# Altium PCB arduino_sh.PcbDoc
Units mm, origin at the board's own origin, x right, y up, seen from the top; angles counter-clockwise.
Board outline 106.93 x 68.96 mm, 2 copper layers (Top Layer, Bottom Layer); 55 components, 128 nets, 404 pads, 55 vias.
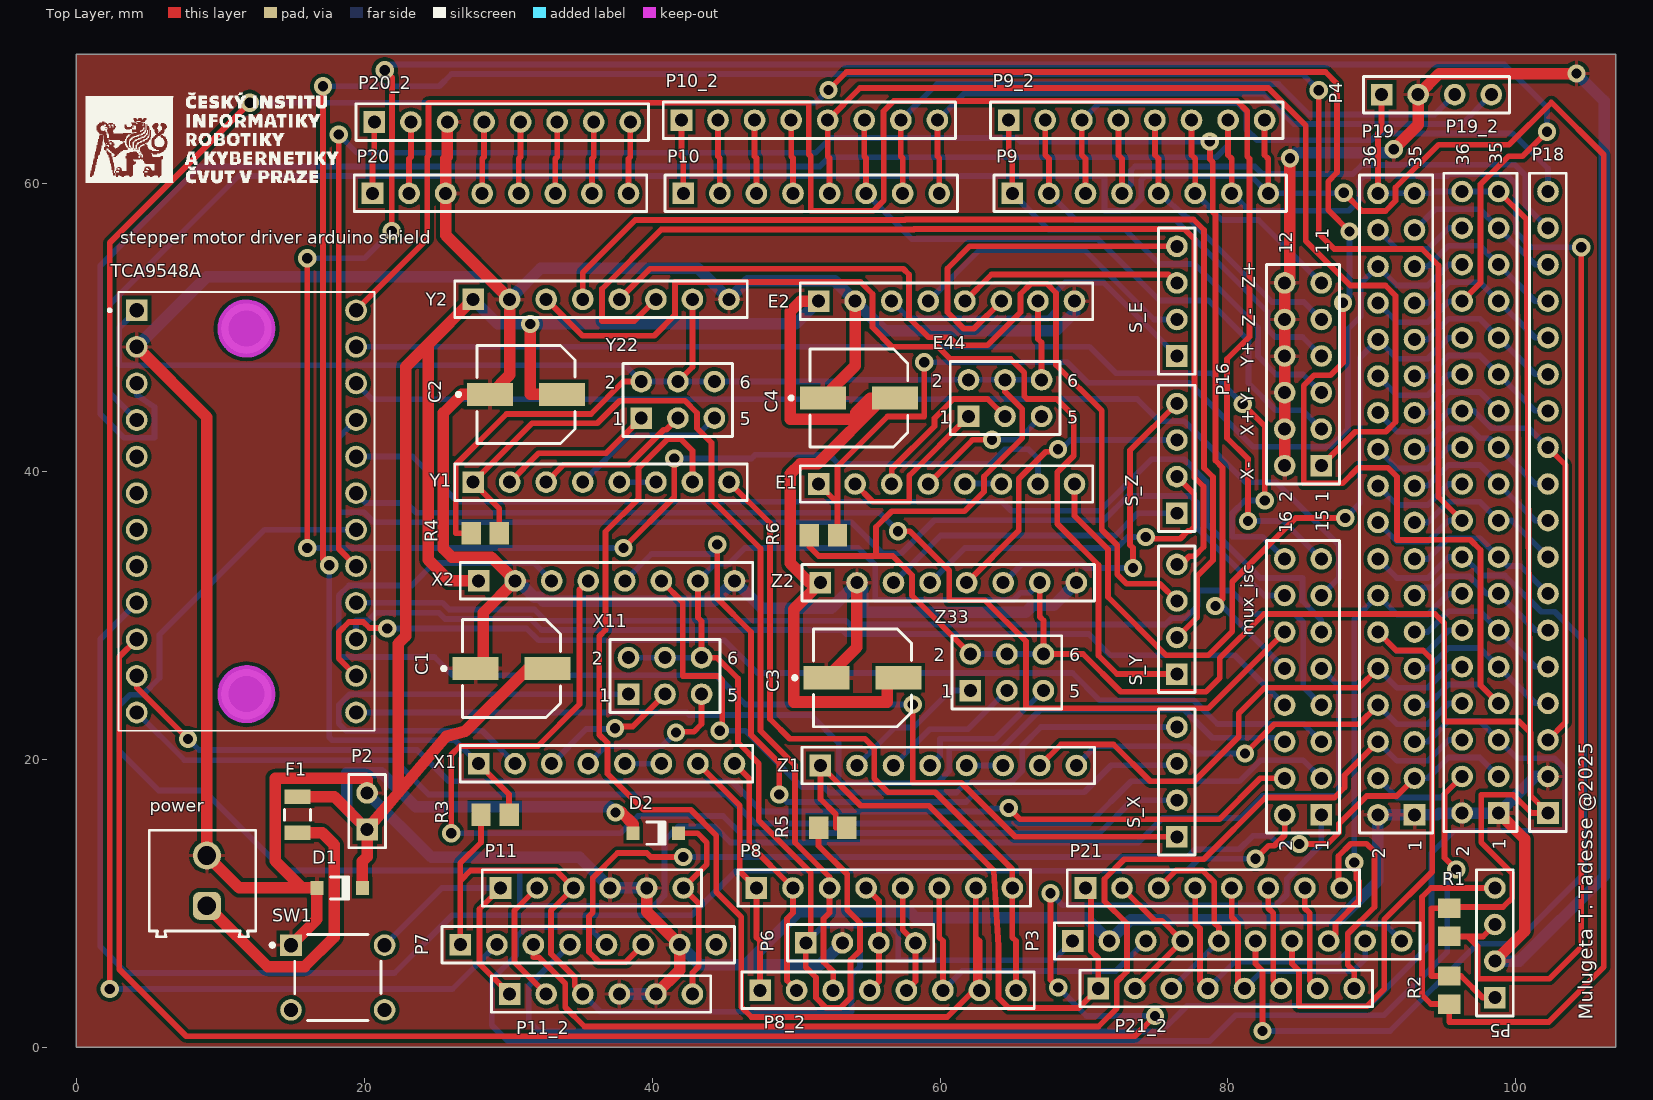
[diagram p0: Top Layer view]
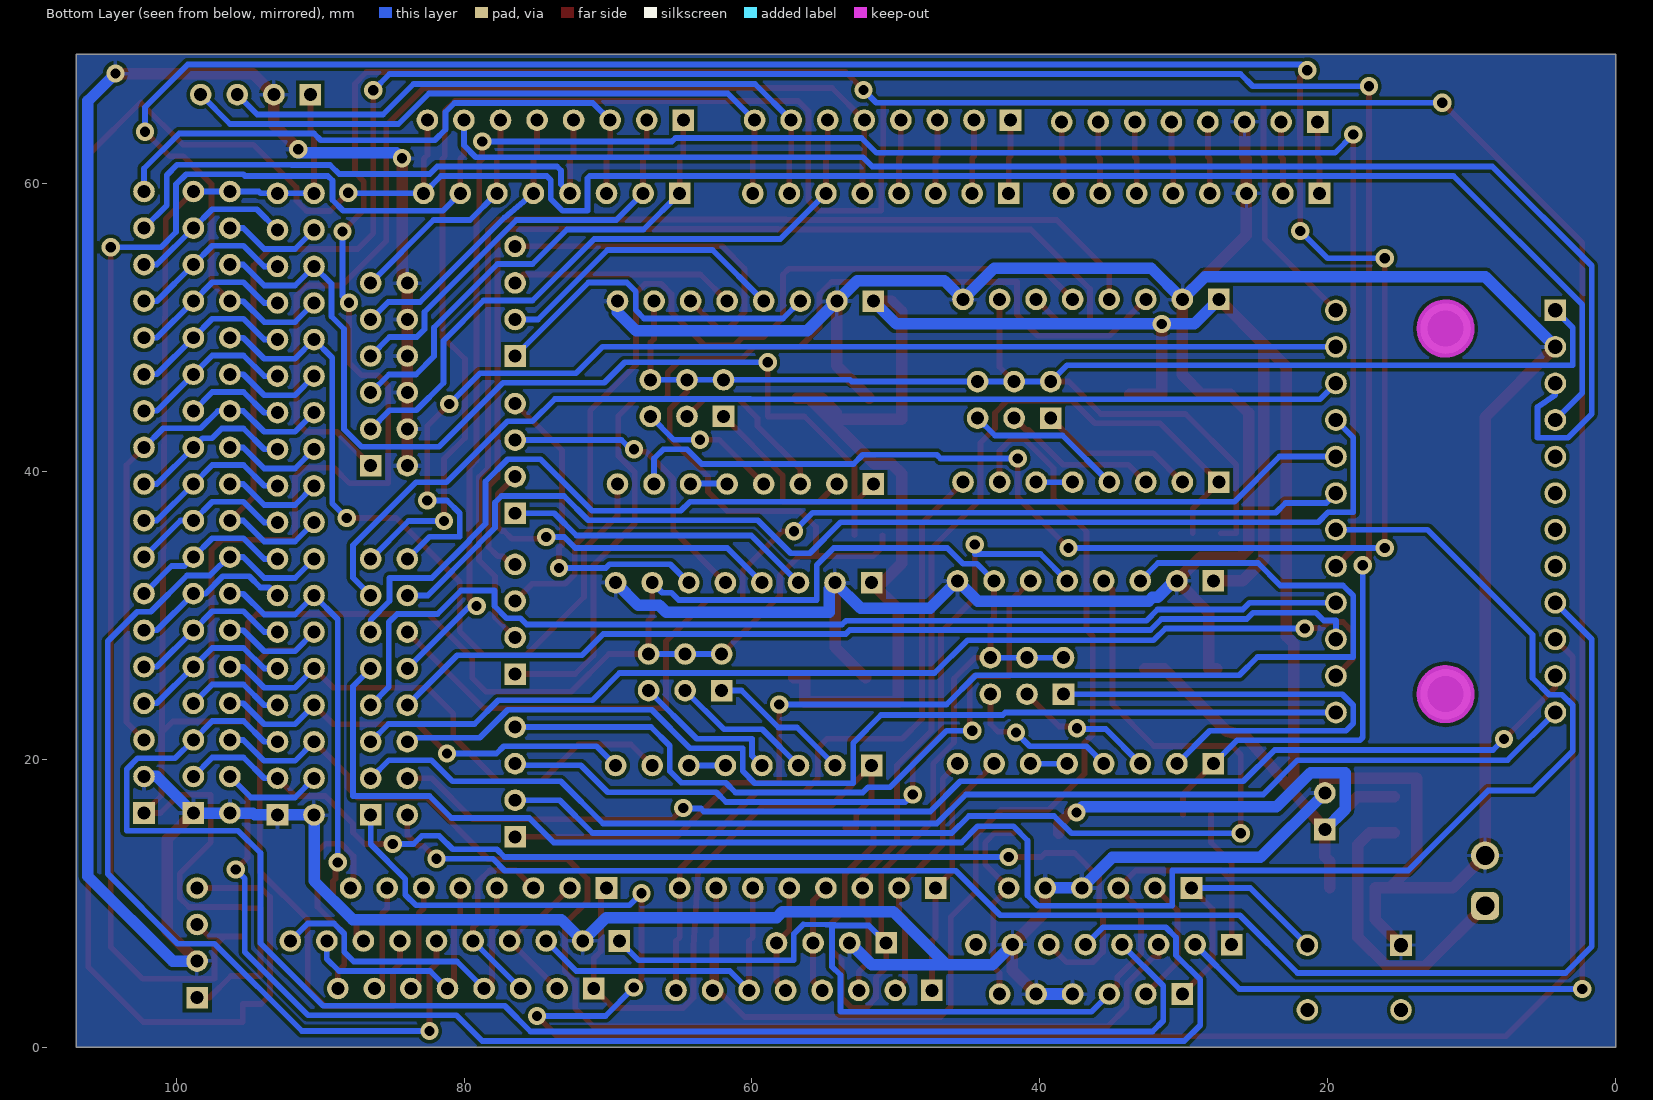
[diagram p1: Bottom Layer view, seen from below]

## Layer stack, top to bottom
Top Solder: solder mask 0.0102, Solder Resist, Dk 3.5
Top Layer: signal copper 0.0356
Dielectric 1: dielectric 0.32, FR-4, Dk 4.8
Bottom Layer: signal copper 0.0356
Bottom Solder: solder mask 0.0102, Solder Resist, Dk 3.5

## Board outline
0,0 0,68.961 106.934,68.961 106.934,0

## Design rules (kind name [scope] priority, off if disabled: settings)
Clearance [All] p1: gap=0.254 ignorepadtopadclearanceinfootprint=FALSE except(0: Arc-Hole Track-Hole SMDPad-Hole THPad-Hole Via-Hole Fill-Hole Poly-Hole Region-Hole Text-Hole)
PolygonConnect [All] p1: connectstyle=Relief reliefconductorwidth=0.254 reliefentries=4 polygonreliefangle="90 Angle" airgapwidth=0.254
RoutingVias [All] p1: holewidth=0.711 width=1.27 viastyle="Through Hole" minholewidth=0.711 minwidth=1.27 maxholewidth=0.711 maxwidth=1.27
SolderMaskExpansion [All] p1: expansion=0.102 istentingtop=FALSE
Width VCC [InNet('VCC')] p1: maxlimit=0.8 minlimit=0.8 preferedwidth=0.8
Width GND [InNet('gnd')] p2: maxlimit=0.8 minlimit=0.8 preferedwidth=0.8
Width [All] p3: maxlimit=0.8 minlimit=0.4 preferedwidth=0.4
30 further rules are at their usual default settings.

## Components (designator, comment, footprint, x,y, rotation, side; value= is the part's Value field where it differs from the comment)
C1 "EEEFT1V101AP" FP-FTD-MFG 30.226,26.289 r0 top
C2 "EEEFT1V101AP" FP-FTD-MFG 31.242,45.339 r0 top
C3 "EEEFT1V101AP" FP-FTD-MFG 54.61,25.654 r0 top
C4 "EEEFT1V101AP" FP-FTD-MFG 54.356,45.085 r0 top
D1 "1N4148W-7-F" DIOD-SOD123-2_V 18.288,11.049 r0 top
D2 "1N4148W-7-F" DIOD-SOD123-2_V 40.259,14.859 r0 top
E1 "Header 8" HDR1X8 51.562,39.116 r0 top
E2 "Header 8" HDR1X8 51.562,51.816 r0 top
E44 "Header 3X2" HDR2X3 61.976,43.815 r0 top
F1 "TR/3216FF10-R" FP-3216FF-MFG 15.367,16.129 r90 top
mux_isc "Header 8X2" HDR2X8 86.487,16.129 r90 top
P2 "Header 2" HDR1X2 20.193,15.113 r90 top
P3 "Header 10" HDR1X10 69.215,7.366 r0 top
P4 "Header 4" HDR1X4 90.678,66.167 r0 top
P5 "I2C" HDR1X4 98.552,3.429 r90 top
P6 "Header 4" HDR1X4 50.673,7.239 r0 top
P7 "Header 8" HDR1X8 26.67,7.112 r0 top
P8 "Header 8" HDR1X8 47.244,11.049 r0 top
P8_2 "Header 8" HDR1X8 47.498,3.937 r0 top
P9 "Header 8" HDR1X8 65.024,59.309 r0 top
P9_2 "Header 8" HDR1X8 64.77,64.389 r0 top
P10 "Header 8" HDR1X8 42.164,59.309 r0 top
P10_2 "Header 8" HDR1X8 42.037,64.389 r0 top
P11 "Header 6" HDR1X6 29.464,11.049 r0 top
P11_2 "Header 6" HDR1X6 30.099,3.683 r0 top
P16 "LIMIT_SWITCH" HDR2X6 86.487,40.386 r90 top
P18 "Header 18" HDR1X18 102.235,16.256 r90 top
P19 "Header 18X2" HDR2X18 92.964,16.129 r90 top
P19_2 "Header 18X2" HDR2X18 98.806,16.256 r90 top
P20 "Header 8" HDR1X8 20.574,59.309 r0 top
P20_2 "Header 8" HDR1X8 20.701,64.262 r0 top
P21 "Header 8" HDR1X8 70.104,11.049 r0 top
P21_2 "Header 8" HDR1X8 70.993,4.064 r0 top
power "691214110002" 691214110002 8.763,11.557 r90 top
R1 "4.7K" RESC2013X70X40ML20T20 95.377,8.659 r270 top
R2 "4.7K" RESC2013X70X40ML20T20 95.377,3.96 r270 top
R3 "ERJ-6ENF1002V" RESC2013X70X40ML20T20 29.083,16.129 r0 top
R4 "ERJ-6ENF1002V" RESC2013X70X40ML20T20 28.407,35.687 r0 top
R5 "ERJ-6ENF1002V" RESC2013X70X40ML20T20 52.537,15.24 r0 top
R6 "ERJ-6ENF1002V" RESC2013X70X40ML20T20 51.902,35.56 r0 top
S_E "Header 4" HDR1X4 76.454,48.006 r90 top
S_X "Header 4" HDR1X4 76.454,14.605 r90 top
S_Y "Header 4" HDR1X4 76.454,25.908 r90 top
S_Z "Header 4" HDR1X4 76.454,37.084 r90 top
SW1 "1825910-6" TECO-1825910-6_V 18.161,4.826 r0 top
TCA9548A "2717" MODULE_2717 11.811,37.211 r0 top
X1 "Header 8" HDR1X8 27.94,19.685 r0 top
X2 "Header 8" HDR1X8 27.94,32.385 r0 top
X11 "Header 3X2" HDR2X3 38.354,24.511 r0 top
Y1 "Header 8" HDR1X8 27.559,39.243 r0 top
Y2 "Header 8" HDR1X8 27.559,51.943 r0 top
Y22 "Header 3X2" HDR2X3 39.243,43.688 r0 top
Z1 "Header 8" HDR1X8 51.689,19.558 r0 top
Z2 "Header 8" HDR1X8 51.689,32.258 r0 top
Z33 "Header 3X2" HDR2X3 62.103,24.765 r0 top

## Footprints (in the part's own frame and the unit in brackets; to place one, negate y for a bottom-side part, rotate by r counter-clockwise, add the part's x,y. Pads: shape width x height; smd on the part's side, far side on the other; paste and mask are expansions set on the pad)
691214110002 [mm] "3.50 mm Horizontal Entry Modular, 2p"
  rrect50% 1.95x1.95 hole 1.3: 1(-1.75,-0.3)
  round 1.95 hole 1.3: 2(1.75,-0.3)
  silkscreen extent -3.9,-3.7 3.5,3.7, body extent -3.95,-3.7 3.5,3.7, height 8.55
DIOD-SOD123-2_V [mm] "SOD123, 2-Leads, Body 2.7x1.55mm, Height 1.45mm"
  rect 0.9x0.95 smd: 1(-1.575,0) 2(1.575,0)
  silkscreen extent -0.63,-0.83 0.64,0.77, body extent -1.35,-0.77 1.35,0.77, height 1.45
FP-3216FF-MFG [mm]
  rect 1x1.8 smd paste+0 mask+0: 1(-1.25,0) 2(1.25,0)
  silkscreen extent -0.37,-0.9 0.37,0.9, body extent -1.85,-1 1.85,1, height 0.25
FP-FTD-MFG [mm]
  rect 3.2x1.6 smd paste+0 mask+0: 1(-2.5,0) 2(2.5,0)
  silkscreen extent -4.82,-3.4 3.4,3.4, body extent -4.35,-3.65 4.35,3.65, height 0.25
HDR1X2 [mm] "Connector; Header; 2 Position"
  rect 1.5x1.5 hole 0.9: 1(0,0)
  round 1.5 hole 0.9: 2(2.54,0)
  silkscreen extent -1.27,-1.27 3.81,1.27
HDR1X4 [mm] "Connector; Header; 4 Position"
  rect 1.5x1.5 hole 0.9: 1(0,0)
  round 1.5 hole 0.9: 2(2.54,0) 3(5.08,0) 4(7.62,0)
  silkscreen extent -1.27,-1.27 8.89,1.27
HDR1X6 [mm] "Connector; Header; 6 Position"
  rect 1.5x1.5 hole 0.9: 1(0,0)
  round 1.5 hole 0.9: 2(2.54,0) 3(5.08,0) 4(7.62,0) 5(10.16,0) 6(12.7,0)
  silkscreen extent -1.27,-1.27 13.97,1.27
HDR1X8 [mm] "Connector; Header; 8 Position"
  rect 1.5x1.5 hole 0.9: 1(0,0)
  round 1.5 hole 0.9: 2(2.54,0) 3(5.08,0) 4(7.62,0) 5(10.16,0) 6(12.7,0) 7(15.24,0) 8(17.78,0)
  silkscreen extent -1.27,-1.27 19.05,1.27
HDR1X10 [mm] "Connector; Header; 10 Position"
  rect 1.5x1.5 hole 0.9: 1(0,0)
  round 1.5 hole 0.9: 2(2.54,0) 3(5.08,0) 4(7.62,0) 5(10.16,0) 6(12.7,0) 7(15.24,0) 8(17.78,0) 9(20.32,0) 10(22.86,0)
  silkscreen extent -1.27,-1.27 24.13,1.27
HDR1X18 [mm] "Connector; Header; 18 Position"
  rect 1.5x1.5 hole 0.9: 1(0,0)
  round 1.5 hole 0.9: 2(2.54,0) 3(5.08,0) 4(7.62,0) 5(10.16,0) 6(12.7,0) 7(15.24,0) 8(17.78,0) 9(20.32,0) 10(22.86,0) 11(25.4,0) 12(27.94,0) 13(30.48,0) 14(33.02,0) 15(35.56,0) 16(38.1,0) 17(40.64,0) 18(43.18,0)
  silkscreen extent -1.27,-1.27 44.45,1.27
HDR2X3 [mm] "Connector; Header; 3x2 Position"
  rect 1.5x1.5 hole 0.9: 1(0,0)
  round 1.5 hole 0.9: 2(0,2.54) 3(2.54,0) 4(2.54,2.54) 5(5.08,0) 6(5.08,2.54)
  silkscreen extent -1.27,-1.27 6.35,3.81
HDR2X6 [mm] "Connector; Header; 6x2 Position"
  rect 1.5x1.5 hole 0.9: 1(0,0)
  round 1.5 hole 0.9: 2(0,2.54) 3(2.54,0) 4(2.54,2.54) 5(5.08,0) 6(5.08,2.54) 7(7.62,0) 8(7.62,2.54) 9(10.16,0) 10(10.16,2.54) 11(12.7,0) 12(12.7,2.54)
  silkscreen extent -1.27,-1.27 13.97,3.81
HDR2X8 [mm] "Connector; Header; 8x2 Position"
  rect 1.5x1.5 hole 0.9: 1(0,0)
  round 1.5 hole 0.9: 2(0,2.54) 3(2.54,0) 4(2.54,2.54) 5(5.08,0) 6(5.08,2.54) 7(7.62,0) 8(7.62,2.54) 9(10.16,0) 10(10.16,2.54) 11(12.7,0) 12(12.7,2.54) 13(15.24,0) 14(15.24,2.54) 15(17.78,0) 16(17.78,2.54)
  silkscreen extent -1.27,-1.27 19.05,3.81
HDR2X18 [mm] "Connector; Header; 18x2 Position"
  rect 1.5x1.5 hole 0.9: 1(0,0)
  round 1.5 hole 0.9: 2(0,2.54) 3(2.54,0) 4(2.54,2.54) 5(5.08,0) 6(5.08,2.54) 7(7.62,0) 8(7.62,2.54) 9(10.16,0) 10(10.16,2.54) 11(12.7,0) 12(12.7,2.54) 13(15.24,0) 14(15.24,2.54) 15(17.78,0) 16(17.78,2.54) 17(20.32,0) 18(20.32,2.54) 19(22.86,0) 20(22.86,2.54) 21(25.4,0) 22(25.4,2.54) 23(27.94,0) 24(27.94,2.54) 25(30.48,0) 26(30.48,2.54) 27(33.02,0) 28(33.02,2.54) 29(35.56,0) 30(35.56,2.54) 31(38.1,0) 32(38.1,2.54) 33(40.64,0) 34(40.64,2.54) 35(43.18,0) 36(43.18,2.54)
  silkscreen extent -1.27,-1.27 44.45,3.81
MODULE_2717 [mil]
  rect 59.37x59.37 / inner round 59.37 / far side rect 59.37x59.37 hole 39.37 mask+1.97: 1(-300,550)
  round 59.37 hole 39.37 mask+1.97: 2(-300,450) 3(-300,350) 4(-300,250) 5(-300,150) 6(-300,50) 7(-300,-50) 8(-300,-150) 9(-300,-250) 10(-300,-350) 11(-300,-450) 12(-300,-550) 13(300,-550) 14(300,-450) 15(300,-350) 16(300,-250) 17(300,-150) 18(300,-50) 19(300,50) 20(300,150) 21(300,250) 22(300,350) 23(300,450) 24(300,550)
  round 138.43 hole 98.43 mask+1.97: P1(0,500) P2(0,-500)
  Keep-Out Layer circle w80: c0,-500 r39.37
  Keep-Out Layer circle w80: c0,-500 r39.37
  Keep-Out Layer circle w80: c0,500 r39.37
  Keep-Out Layer circle w80: c0,500 r39.37
  silkscreen extent -378,-600 350,600
RESC2013X70X40ML20T20 [mm] "Chip Resistor, 2-Leads, Body 2.00x1.25mm, IPC Low Density"
  rect 1.35x1.55 smd: 1(-0.975,0) 2(0.975,0)
  body extent -1.1,-0.72 1.1,0.72, height 0.7
TECO-1825910-6_V [mm] "Switch, 4-Leads, Body 5.99x5.99mm"
  rect 1.5x1.5 hole 0.99: 1(-3.25,2.25)
  round 1.5 hole 0.99: 2(3.25,2.25) 3(-3.25,-2.25) 4(3.25,-2.25)
  silkscreen extent -4.67,-2.99 2.99,2.99, body extent -3,-2.99 2.99,3, height 5

## Part data
C1 C2 C3 C4: library part CMP-05427-000027-1, "CAP ALUM 100UF 20% 35V SMD", Capacitance=100uF, Case/Package=Radial, ESR (Equivalent Series Resistance)=260mR, Leakage Current=35uA, Max Operating Temperature=105°C, Min Operating Temperature=-55°C, Package Quantity=1000, Ripple Current=300mA, Tolerance=20%, Voltage=35V, Construction=Cylindrical, Contact Plating=Tin, Diameter=6.3mm, Height=5.8mm, Height - Seated (Max)=0.24inch, Lead Diameter=0.65mm, Lead Pitch=1.8mm, Length=5.8mm, Life (Hours)=2000Hour, Mount="Surface Mount", Number of Pins=2, Packaging="Tape and Reel", Polarity=Polar, Radiation Hardening=No, REACH SVHC="No SVHC", Ripple Current (AC)=300mA, RoHS Compliant=Yes, Series=FT, Termination=SMD/SMT, Voltage Rating=35V, Voltage Rating (DC)=35V
D1 D2: library part CMP-2000-04932-2, "Fast Switching Diode, 100 V, 0.15 A, -65 to 150 degC, 2-Pin?SOD123, RoHS, Tape and Reel", If - Forward Current=0.15A, Ir - Reverse Current=1uA, Manufacturer=DiodesIncorporated, Max Surge Current=2A, Maximum Operating Temperature=+150C, Minimum Operating Temperature=-65C, Operating Temperature Range=-65Cto+150C, Package / Case=SOD-123, Package Reference=SOD123-2, Peak Reverse Voltage=100V, Vf - Forward Voltage=1.25V, Brand=DiodesIncorporated, Configuration=Single, Datasheet URL=http://www.farnell.com/datasheets/1915529.pdf, Datasheet Version="Rev. 24-2, 10/2013", Factory Pack Quantity=3000, Height=1.25mm, Length=2.85mm, Manufacturer URL=http://www.diodes.com/, Mounting Style=SMD/SMT, Package URL=http://www.diodes.com/datasheets/ds18004.pdf, Packaging=Reel, Product=SwitchingDiodes, Product Category=Diodes-GeneralPurpose,Power,Switching, Recovery Time=4ns, RoHS=True, Series=1N4148, Type=SwitchingDiode, Unit Weight=0.000353oz, Width=1.7mm
E1 E2 P7 P8 P8_2 P9 P9_2 P10 P10_2 P20 P20_2 P21 P21_2 X1 X2 Y1 Y2 Z1 Z2: "Header, 8-Pin", LatestRevisionDate=17-Jul-2002, LatestRevisionNote="Re-released for DXP Platform.", Publisher="Altium Limited"
E44 X11 Y22 Z33: "Header, 3-Pin, Dual row", LatestRevisionDate=17-Jul-2002, LatestRevisionNote="Re-released for DXP Platform.", Publisher="Altium Limited"
F1: library part CMP-03047-09453137-1, "TR/3216FF10-R 10 A AC 24 V DC Fuse Board Mount (Cartridge Style Excluded) Surface Mount 1206 (3216 Metric)", Case/Package=1206, Current Rating=10A, Max Operating Temperature=125°C, Max Voltage Rating (DC)=24V, Min Operating Temperature=-55°C, Resistance=4.5mΩ, Voltage Rating (AC)=32V, Approvals="CSA, UR", Depth=1.6mm, Fuse Current=10A, Height=889µm, Length=3.2mm, Mount="Surface Mount", NexarPartId=9453137, Number of Pins=2, Packaging="Cut Tape", Radiation Hardening=No, REACH SVHC="No SVHC", RoHS=Compliant, Schedule B="8536100040, 8536100040", Termination=SMD/SMT, Voltage Rating=24V, Voltage Rating (DC)=24V, Weight=453.59237mg, Width=1.6mm
mux_isc: "Header, 8-Pin, Dual row", LatestRevisionDate=17-Jul-2002, LatestRevisionNote="Re-released for DXP Platform.", Publisher="Altium Limited"
P2: "Header, 2-Pin", LatestRevisionDate=17-Jul-2002, LatestRevisionNote="Re-released for DXP Platform.", Publisher="Altium Limited"
P3: "Header, 10-Pin", LatestRevisionDate=17-Jul-2002, LatestRevisionNote="Re-released for DXP Platform.", Publisher="Altium Limited"
P4 P6 S_E S_X S_Y S_Z: "Header, 4-Pin", LatestRevisionDate=17-Jul-2002, LatestRevisionNote="Re-released for DXP Platform.", Publisher="Altium Limited"
P5: library part "Header 4", "Header, 4-Pin", LatestRevisionDate=17-Jul-2002, LatestRevisionNote="Re-released for DXP Platform.", Publisher="Altium Limited"
P11 P11_2: "Header, 6-Pin", LatestRevisionDate=17-Jul-2002, LatestRevisionNote="Re-released for DXP Platform.", Publisher="Altium Limited"
P16: library part "Header 6X2", "Header, 6-Pin, Dual row", LatestRevisionDate=17-Jul-2002, LatestRevisionNote="Re-released for DXP Platform.", Publisher="Altium Limited"
P18: "Header, 18-Pin", LatestRevisionDate=17-Jul-2002, LatestRevisionNote="Re-released for DXP Platform.", Publisher="Altium Limited"
P19 P19_2: "Header, 18-Pin, Dual row", LatestRevisionDate=17-Jul-2002, LatestRevisionNote="Re-released for DXP Platform.", Publisher="Altium Limited"
power: library part CMP-1502-02464-2, Color="Blue, Green", Current=10A, Max Operating Temperature=105°C, Min Operating Temperature=-40°C, Voltage=300V, Contact Material=Brass, Contact Plating="Brass, Tin", Current Rating=10A, Height=8.7mm, Housing Material=Nylon, Lead Pitch=3.5mm, Length=7.4mm, Mount="Through Hole", NexarPartId=18818288, Number of Contacts=2, Number of Levels=1, Number of Pins=2, Number of Positions Per Level=2, Number of Rows=1, Packaging=Box, Pitch=3.5052mm, Plating="Brass, Steel", REACH SVHC=Unknown, RoHS=Compliant, Stripping Length=-6mm, Termination=Screw, Voltage Rating=300V, Width=7.9mm, Wire Gauge (Max)=24AWG, Wire Gauge (Min)=16AWG, Wire/Cable Gauge=24AWG
R1 R2: library part CMP-2001-04376-1, Manufacturer=Panasonic, Part Number=ERJ-6ENF1002V
R3 R4 R5 R6: library part CMP-2001-04376-1, Manufacturer=Panasonic, Part Number=ERJ-6ENF1002V
SW1: library part CMP-1684-00021-1, "Tact Switch, SPST-NO, 0.05 A, -35 to 85 degC, 4-Pin THD, RoHS, Bulk", Actuator Color=Black, Contact Rating @ Voltage=0.05A@24VDC, Dielectric Strength=500VAC, Manufacturer="TE Connectivity", Maximum AC Voltage Rating=N/A, Maximum Contact Resistance=100mOhm, Maximum DC Voltage Rating=24V, Minimum Insulation Resistance=100MOhm, Operating Temperature=-35to85C, Package Description="4-Pin Through Hole Device, Body 5.99 x 5.99 mm, Pitch 6.5 mm", Package Reference=THD, Actuator Length=1.4mm, Actuator Material=PolybutyleneTerephthalate, Actuator Style=RoundButton, Base Material=N/A, Body Orientation=Straight, Bushing Type=Unthreaded, Contact Material=CopperAlloy, Contact Plating=Silver, Datasheet URL=http://www.te.com/commerce/DocumentDelivery/DDEController?Action=showdoc&DocId=Customer+Drawing%7F1825910%7FC9%7Fpdf%7FEnglish%7FENG_CD_1825910_C9.pdf%7F1825910-6, Datasheet Version="Rev. C9", Dimension=5.99x5mm, Electrical Life=100000Cycles, Family=1825910, Function=MomentaryContact, Housing Material=N/A, Illumination=N/R, Manufacturer URL=http://www.te.com, Mechanical Life=100000Cycles, Mounting=ThroughHole, Packaging=N/A, Part No=1825910-6, Pole Throw Configuration=SPST, Product Weight=N/A, RoHS=Yes, Seal Description=N/A, Seal Location=N/A, Switch Configuration=OFF(ON), Terminal Type=PCPins, Thread Size=N/R
TCA9548A: "Module: multiplexer; I2C interface multiplexer; TCA9548A; 3Ã·5VDC", Package=None, Availability="In Stock", Check_prices=https://www.snapeda.com/parts/2717/Adafruit+Industries+LLC/view-part/?ref=eda, MF=Adafruit, MP=2717, Price=None, Purchase-URL=https://pricing.snapeda.com/search/part/2717/?ref=eda, SnapEDA_Link=https://www.snapeda.com/parts/2717/Adafruit+Industries+LLC/view-part/?ref=snap

## Via types
v1: diameter 1.27, hole 0.711, Top Layer to Bottom Layer, 55 vias

## Nets (pads, with @x,y where several pads share a name; then routed paths per layer and width w, separated by ;. In a path a pad name is that pad's centre, name@x,y a point inside that pad or via, vN(x,y) a via of type N, cw(c..) or ccw(c..) an arc to the next point about the centre after c; other vN are vias at no path point)
A1_e: E2.5 S_E.3 | length 15.7
  Top Layer w0.4: E2.5 63.58,53.674 75.866,53.674 S_E.3
A1_x: S_X.3 X2.5 | length 56
  Top Layer w0.4: v1(44.516,34.917) 44.516,31.181 46.872,28.825 46.872,21.694 48.829,19.738 v1(48.829,17.54)
  Bottom Layer w0.4: X2.5 39.958,34.243 44.516,34.243 v1(44.516,34.917) ; v1(48.829,17.54) 49.346,17.023 61.798,17.023 62.475,17.7 70.017,17.7 71.89,19.573 76.161,19.573 76.161,19.685 S_X.3
A1_y: S_Y.3 Y2.5 | length 64.2
  Top Layer w0.4: Y2.5 39.845,54.069 57.451,54.069 57.846,53.674 57.846,50.653 59.19,49.309 60.654,49.309 61.203,48.76 63.305,48.76 65.591,51.046 65.591,52.316 66.295,53.02 67.427,53.02 68.055,52.392 68.055,47.388 71.23,44.213 71.23,35.942 72.317,34.855 72.317,32.823 72.955,32.185 75.257,32.185 S_Y.3
A1_z: S_Z.3 Z2.5 | length 20.8
  Top Layer w0.4: Z2.5 65.466,35.875 65.466,39.483 67.346,41.363 68.033,41.363 v1(68.199,41.529)
  Bottom Layer w0.4: v1(68.199,41.529) 68.434,41.529 69.069,42.164 S_Z.3
A2_e: E2.6 S_E.4 | length 24.6
  Top Layer w0.4: E2.6 62.349,49.903 61.654,49.903 60.511,51.046 60.511,54.094 62.043,55.626 S_E.4
A2_x: S_X.4 X2.6 | length 50.1
  Top Layer w0.4: X2.6 42.121,30.904 42.121,25.773 44.587,25.773 44.864,25.496 44.864,22.131 v1(44.704,21.971)
  Bottom Layer w0.4: v1(44.704,21.971) 46.482,21.971 50.402,18.051 51.932,18.051 52.307,17.677 61.144,17.677 61.821,18.354 64.905,18.354 65.718,19.167 65.718,20.933 67.01,22.225 S_X.4
A2_y: S_Y.4 Y2.6 | length 73.8
  Top Layer w0.4: Y2.6 38.752,50.436 36.508,50.436 36.508,52.672 40.633,56.797 58.173,56.797 58.213,56.837 76.97,56.837 77.681,56.126 77.681,39.573 78.312,38.942 78.312,34.735 77.667,34.09 77.314,34.09 76.752,33.528 S_Y.4
A2_z: S_Z.4 Z2.6 | length 22.5
  Top Layer w0.4: v1(73.406,33.274) 73.406,34.68 73.206,34.88 73.206,41.456 S_Z.4
  Bottom Layer w0.4: Z2.6 65.672,33.541 69.889,33.541 70.156,33.274 v1(73.406,33.274)
A3: P4.3 P10.7 P10_2.7 | length 46.1
  Top Layer w0.4: P10_2.7 57.277,61.892 57.404,61.765 P10.7
  Bottom Layer w0.4: P10_2.7 59.789,66.901 83.521,66.901 85.642,64.78 94.371,64.78 P4.3
A4: P4.4 P10.8 P10_2.8 | length 46.1
  Top Layer w0.4: P10_2.8 59.817,61.892 59.944,61.765 P10.8
  Bottom Layer w0.4: P10_2.8 61.675,66.247 82.445,66.247 84.566,64.126 96.257,64.126 P4.4
A5: P3.3 P8.6 P8_2.6 | length 22.7
  Top Layer w0.4: P8.6 59.944,7.612 60.198,7.358 P8_2.6
  Bottom Layer w0.4: P8_2.6 61.536,5.275 72.204,5.275 P3.3
A9: P3.4 P21.2 P21_2.2 | length 10.4
  Top Layer w0.4: P21.2 74.913,8.78 75.421,8.78 P3.4 P21_2.2
A10: P3.5 P21.3 P21_2.3 | length 13.6
  Top Layer w0.4: P21.3 76.395,12.26 78.24,12.26 79.053,11.447 79.053,8.62 79.375,8.298 P3.5
  Bottom Layer w0.4: P21_2.3 P3.5
A11: P3.10 P21.4 P21_2.4 | length 23.9
  Top Layer w0.4: P21.4 77.724,8.577 78.062,8.239 78.062,4.615 P21_2.4
  Bottom Layer w0.4: P21_2.4 80.485,5.936 87.663,5.936 88.324,6.596 88.324,7.866 89.035,8.577 90.864,8.577 P3.10
A12: P3.9 P21.5 P21_2.5 | length 17.8
  Top Layer w0.4: P21.5 80.264,9.017 80.704,8.577 80.704,4.513 P21_2.5
  Bottom Layer w0.4: P21_2.5 82.364,5.275 88.689,5.275 89.535,6.122 P3.9
B1_e: E2.4 S_E.2 | length 20.7
  Bottom Layer w0.4: E2.4 62.743,55.377 70.04,55.377 74.871,50.546 S_E.2
B1_x: S_X.2 X2.4 | length 77
  Top Layer w0.4: v1(26.035,14.859) 26.035,20.304 26.653,20.922 32.063,20.922 34.958,23.817 34.958,31.783 X2.4
  Bottom Layer w0.4: v1(26.035,14.859) 26.043,14.851 37.803,14.851 39.009,16.057 44.931,16.057 46.12,14.868 71.081,14.868 73.358,17.145 S_X.2
B1_y: S_Y.2 Y2.4 | length 76.5
  Top Layer w0.4: Y2.4 35.179,53.807 38.823,57.451 57.559,57.451 57.606,57.498 77.605,57.498 78.342,56.761 78.342,40.22 78.966,39.596 78.966,33.816 77.85,32.7 77.85,29.844 S_Y.2
B1_z: S_Z.2 Z2.4 | length 24
  Top Layer w0.4: v1(74.295,35.433) 74.422,35.306 76.689,35.306 77.232,35.849 77.375,35.849 77.658,36.131 77.658,38.42 S_Z.2
  Bottom Layer w0.4: Z2.4 61.714,34.663 72.274,34.663 73.044,35.433 v1(74.295,35.433)
B2_e: E2.3 S_E.1 | length 24.2
  Bottom Layer w0.4: E2.3 57.846,50.612 67.494,50.612 68.08,51.198 68.08,52.494 68.696,53.11 71.35,53.11 S_E.1
B2_x: S_X.1 X2.3 | length 87.1
  Top Layer w0.4: v1(58.098,23.792) 58.098,18.354 61.478,18.354 65.227,14.605 S_X.1
  Bottom Layer w0.4: X2.3 31.783,33.622 24.849,33.622 23.3,32.072 18.931,32.072 18.22,31.361 18.22,27.094 24.875,27.094 26.145,25.824 44.458,25.824 46.49,23.792 v1(58.098,23.792)
B2_y: S_Y.1 Y2.3 | length 71
  Top Layer w0.4: Y2.3 35.162,49.42 40.14,49.42 41.588,50.868 41.588,53.154 54.467,53.154 55.306,52.315 55.306,49.999 56.65,48.655 59.854,48.655 60.714,47.795 64.905,47.795 65.845,46.855 65.845,45.219 66.038,45.026 68.105,45.026 69.288,43.844 69.288,41.078 68.138,39.928 68.138,36.358 71.009,33.487 71.009,27.196 72.297,25.908 S_Y.1
B2_z: S_Z.1 Z2.3 | length 21.7
  Bottom Layer w0.4: Z2.3 60.047,35.536 72.195,35.536 73.743,37.084 S_Z.1
D1: P6.4 P8.5 P8_2.5 | length 7.7
  Top Layer w0.4: P8.5 57.404,8.128 P6.4 58.293,4.572 P8_2.5
D2: P6.3 P8.4 P8_2.4 | length 7.7
  Top Layer w0.4: P8.4 55.753,10.16 P6.3 55.753,4.572 P8_2.4
D4: P10.4 P10_2.4 | length 5.1
  Top Layer w0.4: P10_2.4 49.657,61.892 49.784,61.765 P10.4
D5: P10.3 P10_2.3 | length 5.1
  Top Layer w0.4: P10_2.3 47.117,61.892 47.244,61.765 P10.3
D6: P10.2 P10_2.2 | length 5.1
  Top Layer w0.4: P10_2.2 44.577,61.892 44.704,61.765 P10.2
D8: P20.8 P20_2.8 | length 5
  Top Layer w0.4: P20.8 38.354,61.714 38.481,61.841 P20_2.8
D9: P20.7 P20_2.7 | length 5
  Top Layer w0.4: P20.7 35.814,61.714 35.941,61.841 P20_2.7
D10: P20.6 P20_2.6 | length 5
  Top Layer w0.4: P20.6 33.274,61.714 33.401,61.841 P20_2.6
D11: P20.5 P20_2.5 | length 5
  Top Layer w0.4: P20.5 30.734,61.714 30.861,61.841 P20_2.5
D16: P9.3 P9_2.3 P18.18 | length 42.7
  Top Layer w0.4: P9_2.3 69.85,61.968 70.104,61.714 P9.3
  Bottom Layer w0.4: P9_2.3 71.054,65.593 80.66,65.593 81.288,64.965 81.288,63.746 82.032,63.002 89.954,63.002 90.424,63.472 99.794,63.472 102.235,61.031 P18.18
D17: P9.4 P9_2.4 P18.17 | length 39.6
  Top Layer w0.4: P9_2.4 72.39,61.968 72.644,61.714 P9.4
  Bottom Layer w0.4: P9.4 73.267,59.932 73.267,60.888 73.546,61.167 81.871,61.167 82.388,60.65 88.672,60.65 89.307,61.285 91.975,61.285 91.984,61.294 99.941,61.294 100.664,60.571 100.664,58.467 P18.17
D23: P18.16 P19.33 P19_2.33 | length 11.5
  Bottom Layer w0.4: P19.33 94.404,58.209 97.493,58.209 P19_2.33 101.346,54.356 P18.16
D25: P18.15 P19.31 P19_2.31 | length 11.5
  Bottom Layer w0.4: P19.31 93.886,54.229 95.326,55.669 97.493,55.669 P19_2.31 101.346,51.816 P18.15
D27: P18.14 P19.29 P19_2.29 | length 11.5
  Bottom Layer w0.4: P19.29 93.886,51.689 95.326,53.129 97.493,53.129 P19_2.29 101.346,49.276 P18.14
D29: P18.13 P19.27 P19_2.27 | length 11.5
  Bottom Layer w0.4: P19.27 93.886,49.149 95.326,50.589 97.493,50.589 P19_2.27 101.346,46.736 P18.13
D31: P18.12 P19.25 P19_2.25 | length 11.5
  Bottom Layer w0.4: P19.25 93.886,46.609 95.326,48.049 97.493,48.049 P19_2.25 101.346,44.196 P18.12
D32: P18.3 P18.11 P19.24 P19_2.24 | length 35.4
  Top Layer w0.4: P18.3 103.462,22.563 103.462,40.429 P18.11
  Bottom Layer w0.4: P19.24 91.753,42.74 93.886,42.74 95.342,44.196 P19_2.24 97.103,44.196 98.307,42.992 100.899,42.992 P18.11
D33: P19.23 P19_2.23 | length 7
  Bottom Layer w0.4: P19.23 93.886,44.069 95.326,45.509 97.493,45.509 P19_2.23
D35: P18.10 P19.21 P19_2.21 | length 11.5
  Bottom Layer w0.4: P19.21 93.886,41.529 95.326,42.969 96.833,42.969 97.509,42.293 98.169,42.293 P19_2.21 101.346,39.116 P18.10
D37: P18.9 P19.19 P19_2.19 | length 11.5
  Bottom Layer w0.4: P19.19 93.886,38.989 95.326,40.429 97.493,40.429 P19_2.19 101.346,36.576 P18.9
D39: P18.8 P19.17 P19_2.17 | length 11.5
  Bottom Layer w0.4: P19.17 93.886,36.449 95.326,37.889 97.493,37.889 P19_2.17 99.695,36.576 P18.8
D40: P3.6 P19.16 P19_2.16 | length 67.4
  Top Layer w0.4: P3.6 81.915,5.791 82.406,5.301 v1(82.406,1.11)
  Bottom Layer w0.4: v1(82.406,1.11) 91.27,1.11 97.341,7.18 99.906,7.18 104.758,12.032 104.758,28.186 102.7,30.243 101.763,30.243 99.248,32.758 97.67,32.758 97.029,33.399 P19_2.16 95.342,34.036 93.886,32.58 91.753,32.58 P19.16
D41: P18.7 P19.15 P19_2.15 | length 11.5
  Bottom Layer w0.4: P19.15 93.886,33.909 95.326,35.349 97.493,35.349 P19_2.15 99.429,33.413 100.318,33.413 P18.7
D42: P3.8 P19.14 P19_2.14 | length 32.7
  Top Layer w0.4: P3.8 87.47,7.841 87.47,8.553 89.111,10.193 89.111,11.525 88.939,11.696 88.939,12.661 v1(88.773,12.827)
  Bottom Layer w0.4: v1(88.773,12.827) 88.773,29.718 P19.14 91.753,30.04 93.886,30.04 95.342,31.496 P19_2.14
D43: P18.6 P19.13 P19_2.13 | length 11.4
  Bottom Layer w0.4: P19.13 93.515,31.92 94.151,31.92 94.931,32.7 96.765,32.7 97.969,31.496 P19_2.13 101.346,28.956 P18.6
D44: P3.7 P19.12 P19_2.12 | length 47
  Top Layer w0.4: P3.7 84.455,5.791 84.946,5.301 84.946,2.837 89.67,2.837 90.864,4.031 90.864,8.857 94.191,12.184 94.191,26.916 93.556,27.551 91.702,27.551 P19.12
  Bottom Layer w0.4: P19.12 91.753,27.5 93.886,27.5 95.342,28.956 P19_2.12
D45: P18.5 P19.11 P19_2.11 | length 11.5
  Bottom Layer w0.4: P19.11 93.886,28.829 95.326,30.269 97.493,30.269 P19_2.11 101.346,26.416 P18.5
D47: P18.4 P19.9 P19_2.9 | length 11.5
  Bottom Layer w0.4: P19.9 93.886,26.289 95.326,27.729 97.493,27.729 P19_2.9 101.346,23.876 P18.4
D49: P7.2 P19.7 P19_2.7 | length 237
  Top Layer w0.4: v1(2.319,4.031) 2.319,55.872 v1(12.048,65.6) ; v1(52.256,66.489) 53.5,67.734 86.774,67.734 87.587,66.921 87.587,60.749 86.963,60.125 86.963,58.147 v1(88.451,56.659) ; v1(87.994,51.706) 87.994,47.541 87.13,46.677 85.987,46.677 85.276,45.966 85.276,39.159 87.968,39.159 89.06,40.251 91.118,40.251 91.753,39.616 91.753,35.222 94.166,35.222 96.833,35.247 97.544,34.536 97.544,25.138 P19_2.7
  Bottom Layer w0.4: v1(2.319,4.031) 26.129,4.031 P7.2 ; v1(12.048,65.6) 51.367,65.6 v1(52.256,66.489) ; v1(87.994,51.706) 88.451,52.164 v1(88.451,56.659) ; P19.7 93.886,23.749 95.326,25.189 97.493,25.189 P19_2.7
D53: P7.6 P19.3 P19_2.3 | length 77.8
  Top Layer w0.4: P7.6 38.143,5.885 36.33,5.885 35.619,6.596 35.619,9.085 35.873,9.339 35.873,11.752 37.6,13.479 39.629,13.479 39.9,13.208 v1(42.164,13.208) ; v1(84.963,14.097) 86.909,14.097 87.714,14.902 87.714,15.511 89.645,17.442 91.737,17.442 P19.3
  Bottom Layer w0.4: v1(42.164,13.208) 77.199,13.208 77.726,13.735 80.788,13.735 81.723,14.67 82.939,14.67 83.512,14.097 v1(84.963,14.097) ; P19.3 93.886,18.669 95.326,20.109 97.493,20.109 P19_2.3
E1-DIR: P19.22 P19_2.22 | length 7
  Bottom Layer w0.4: P19.22 91.753,40.2 93.886,40.2 95.342,41.656 P19_2.22
E1-EN: P19.26 P19_2.26 | length 7
  Bottom Layer w0.4: P19.26 91.753,45.28 93.886,45.28 95.342,46.736 P19_2.26
E1-STEP: P19.20 P19_2.20 | length 7
  Bottom Layer w0.4: P19.20 91.753,37.66 93.886,37.66 95.342,39.116 P19_2.20
E-DIR: E1.8 P19.28 P19_2.28 | length 53.3
  Top Layer w0.4: E1.8 69.342,36.905 71.663,34.584 71.663,31.258 75.7,27.221 78.646,27.221 80.297,28.872 80.297,32.326 84.717,36.746 v1(88.146,36.746)
  Bottom Layer w0.4: v1(88.146,36.746) 89.162,37.762 89.162,47.887 P19.28 91.753,47.82 93.886,47.82 95.342,49.276 P19_2.28
E-EN: E1.1 P19.32 P19_2.32 R6.2 | length 69.4
  Top Layer w0.4: E1.1 52.877,37.801 ; R6.2 52.877,37.801 ; v1(58.911,47.566) 58.911,43.807 56.357,43.807 52.877,40.327 52.877,37.801
  Bottom Layer w0.4: v1(58.911,47.566) 68.842,47.566 70.264,46.144 77.3,46.144 81.745,41.699 87.13,41.699 88.345,42.914 88.345,49.876 89.215,50.746 89.215,53.02 P19.32 91.753,52.9 93.886,52.9 95.342,54.356 P19_2.32
E-STEP: E1.7 P19.30 P19_2.30 | length 201.6
  Top Layer w0.4: v1(16.035,34.663) v1(16.035,54.805) ; v1(21.42,67.861) 21.928,67.353 21.928,63.06 21.903,63.035 v1(21.903,56.685) ; v1(38.006,34.663) 41.537,38.194 41.537,40.886 v1(41.529,40.894) ; P19_2.30 97.544,53.094 97.544,59.936 99.5,61.892 100.465,61.892 v1(102.167,63.594)
  Bottom Layer w0.4: v1(16.035,34.663) v1(38.006,34.663) ; v1(16.035,54.805) 20.023,54.805 v1(21.903,56.685) ; v1(21.42,67.861) 21.827,68.267 99.195,68.267 102.167,65.295 v1(102.167,63.594) ; v1(41.529,40.894) 46.906,40.894 47.16,41.148 52.302,41.148 52.945,40.505 63.483,40.505 64.499,41.521 66.167,41.521 66.802,40.886 E1.7 ; P19.30 91.753,50.36 93.886,50.36 95.342,51.816 P19_2.30
gnd: C1.1 C2.1 C3.1 C4.1 D1.1 E2.2 E2.8 P2.2 P3.2 P4.2 P5.2 P6.2 P7.7 P11.4 P11.5 P11_2.4 P11_2.5 P16.2 P16.4 P16.6 P16.8 P16.10 P16.12 P18.2 P19.1 P19.2 P19_2.1 P19_2.2 P20.3 P20_2.3 power.2 SW1.1 TCA9548A.2 X2.2 X2.8 Y2.2 Y2.8 Z2.2 Z2.8 | length 485.5
  Top Layer w0.8: TCA9548A.2 9.063,43.769 power.2 11.321,11.049 15.697,11.049 ; SW1.1 16.713,8.878 D1.1 15.697,11.049 ; P2.2 20.193,18.567 20.099,18.661 13.8,18.661 13.8,12.946 15.697,11.049 ; P20_2.3 25.781,61.841 25.654,61.714 P20.3 25.654,56.388 Y2.2 30.099,46.696 C2.1 26.788,45.339 25.501,44.052 25.501,34.621 26.094,34.028 28.837,34.028 X2.2 28.278,30.183 28.278,26.289 C1.1 ; P11.5 39.624,9.398 P7.7 41.91,5.334 P11_2.5 ; C4.1 54.102,47.331 E2.2 ; C3.1 54.229,27.773 Z2.2 ; P16.2 P16.4 P16.6 P16.8 P16.10 P16.12 84.311,53.45 v1(84.311,61.739) ; v1(91.524,62.374) 93.218,64.068 P4.2 94.683,67.632 v1(104.224,67.632) ; P5.2 100.61,8.027 100.61,14.452 P19_2.1
  Bottom Layer w0.8: TCA9548A.2 9.066,53.516 28.526,53.516 Y2.2 32.275,54.119 43.163,54.119 Y2.8 46.626,53.23 52.688,53.23 E2.2 56.16,49.758 68.054,49.758 69.342,51.046 E2.8 ; P2.2 24.678,13.168 34.965,13.168 P11.4 P11.5 ; X2.2 30.669,32.385 31.809,31.245 32.175,31.245 32.438,30.981 44.316,30.981 X2.8 47.63,30.475 52.446,30.475 Z2.2 54.645,31.842 54.645,30.2 65.946,30.2 66.447,30.701 67.912,30.701 Z2.8 ; P11_2.4 P11_2.5 ; P7.7 43.314,5.708 ; P6.2 51.682,5.708 46.491,5.708 ; v1(84.311,61.739) 84.711,62.139 91.524,62.139 v1(91.524,62.374) ; P5.2 100.25,5.969 106.129,11.848 106.129,65.727 v1(104.224,67.632) ; P18.2 101.346,18.796 P19_2.1 P19_2.2 94.674,16.256 94.547,16.129 P19.1 P19.2 90.424,11.541 87.74,8.857 73.246,8.857 P3.2 70.13,8.991 58.285,8.991 57.886,9.39 50.173,9.39 46.491,5.708 ; 43.314,5.708 43.315,5.707 46.49,5.707 46.491,5.708 ; 43.314,5.708 46.491,5.708
M0_e: E1.2 E44.1 | length 11.9
  Top Layer w0.4: E1.2 55.329,37.889 57.869,37.889 57.869,39.708 E44.1
M0_x: X1.2 X11.1 | length 35.1
  Bottom Layer w0.4: X1.2 28.196,21.969 18.722,21.969 18.22,22.471 18.22,23.741 18.99,24.511 X11.1
M0_y: Y1.2 Y22.1 | length 11
  Top Layer w0.4: Y1.2 32.104,41.248 36.803,41.248 Y22.1
M0_z: Z1.2 Z33.1 | length 10
  Bottom Layer w0.4: Z1.2 56.866,22.195 58.154,22.195 60.724,24.765 Z33.1
M1_e: E1.3 E44.3 | length 11.8
  Top Layer w0.4: E1.3 56.642,40.17 59.607,43.135 59.607,43.69 60.943,45.026 63.305,45.026 E44.3
M1_x: X1.3 X11.3 | length 9.9
  Top Layer w0.4: v1(37.42,22.152) 37.541,22.272 38.655,22.272 X11.3
  Bottom Layer w0.4: X1.3 35.425,22.09 37.358,22.09 v1(37.42,22.152)
M1_y: Y1.3 Y22.3 | length 11
  Top Layer w0.4: Y1.3 33.85,40.454 38.37,40.454 40.807,42.891 40.986,42.891 Y22.3
M1_z: Z1.3 Z33.3 | length 10
  Bottom Layer w0.4: Z1.3 59.281,22.07 61.948,22.07 Z33.3
M2_e: E1.4 E44.5 | length 9.8
  Top Layer w0.4: E1.4 62.247,42.181 v1(63.61,42.181)
  Bottom Layer w0.4: v1(63.61,42.181) 65.422,42.181 E44.5
M2_x: X1.4 X11.5 | length 11.1
  Top Layer w0.4: v1(41.656,21.844) 41.707,21.895 42.891,21.895 43.434,22.438 X11.5
  Bottom Layer w0.4: X1.4 36.764,20.889 40.701,20.889 v1(41.656,21.844)
M2_y: Y1.4 Y22.5 | length 11
  Bottom Layer w0.4: Y1.4 38.42,42.484 43.119,42.484 Y22.5
M2_z: Z1.4 Z33.5 | length 10.7
  Bottom Layer w0.4: Z1.4 59.991,20.24 59.991,21.416 63.834,21.416 Z33.5
MISO: P7.3 P19.6 P19_2.6 | length 85.2
  Top Layer w0.4: P7.3 31.75,6.24 32.139,6.24 33.968,4.412 33.968,2.761 35.303,1.425 71.012,1.425 72.271,2.684 72.271,4.539 72.982,5.25 72.982,8.577 71.433,10.127 71.433,11.676 72.804,13.048 78.316,13.048 82.609,17.34 87.409,17.34 88.095,18.026 88.095,18.88 P19.6
  Bottom Layer w0.4: P19.6 91.753,19.88 93.886,19.88 95.342,21.336 P19_2.6
MOSI: P7.4 P19.5 P19_2.5 | length 105
  Bottom Layer w0.4: P7.4 31.428,4.25 31.428,1.821 32.179,1.07 75.381,1.07 77.171,2.86 89.797,2.86 94.14,7.203 94.14,13.47 95.699,15.029 103.443,15.029 103.443,19.296 102.681,20.058 100.084,20.058 P19_2.5 97.493,22.649 95.326,22.649 93.886,21.209 P19.5
NetDS?_1: 
NetE1_5: E1.5 E1.6 | length 2.6
  Bottom Layer w0.4: E1.5 61.762,39.156 64.222,39.156 E1.6
NetF1_1: F1.1 power.1 | length 20.7
  Top Layer w0.8: power.1 13.282,5.588 15.853,5.588 17.907,7.642 17.907,14.046 17.074,14.879 F1.1
NetLabel52: P10.1 P10_2.1 | length 5.1
  Top Layer w0.4: P10_2.1 42.037,61.892 42.164,61.765 P10.1
NetLabel69: P11.2 P11_2.2 | length 8.9
  Top Layer w0.4: P11.2 30.437,9.482 30.437,5.885 P11_2.2
NetLabel145: P7.8
NetLabel158: P19.34 P19_2.34 | length 7
  Bottom Layer w0.4: P19.34 91.753,55.44 93.886,55.44 95.342,56.896 P19_2.34
NetLabel172: P20.1 P20_2.1 | length 5
  Top Layer w0.4: P20.1 20.574,61.714 20.701,61.841 P20_2.1
NetLabel173: P20.2 P20_2.2 | length 5
  Top Layer w0.4: P20.2 23.114,61.714 23.241,61.841 P20_2.2
NetLabel185: P21.6 P21_2.6 | length 7.4
  Top Layer w0.4: P21.6 82.804,9.644 83.142,9.306 83.142,4.615 P21_2.6
NetLabel186: P21.7 P21_2.7 | length 7.4
  Top Layer w0.4: P21.7 85.344,9.644 85.682,9.306 85.682,4.615 P21_2.7
NetLabel187: P21.8 P21_2.8 | length 15.9
  Top Layer w0.4: P21.8 87.684,11.249 87.684,13.278 88.534,14.129 89.63,14.129 90.178,13.581 90.178,9.72 88.324,7.866 88.324,5.699 88.773,5.25 P21_2.8
NetX1_5: X1.5 X1.6 | length 2.5
  Bottom Layer w0.4: X1.5 X1.6
NetY1_5: Y1.5 Y1.6 | length 2.5
  Bottom Layer w0.4: Y1.5 Y1.6
NetZ1_5: Z1.5 Z1.6 | length 2.5
  Bottom Layer w0.4: Z1.5 Z1.6
PS-ON: P20.4 P20_2.4 | length 5
  Top Layer w0.4: P20.4 28.194,61.714 28.321,61.841 P20_2.4
RESET: P11.1 P11_2.1 SW1.2 | length 18.5
  Top Layer w0.4: P11.1 27.999,9.584 27.999,5.783 P11_2.1
  Bottom Layer w0.4: SW1.2 25.384,11.049 P11.1
SCK: P7.5 P19.4 P19_2.4 | length 103.6
  Top Layer w0.4: v1(95.868,12.336) 95.055,13.149 95.055,17.585 P19_2.4
  Bottom Layer w0.4: P7.5 35.619,8.323 31.25,8.323 30.539,7.612 30.539,6.367 28.862,4.691 28.862,1.516 29.962,0.416 78.74,0.416 80.526,2.202 90.838,2.202 95.233,6.596 95.233,11.701 v1(95.868,12.336) ; P19.4 91.753,17.34 94.81,17.34 P19_2.4
SCL: P5.4 P9.8 P9_2.8 R2.2 TCA9548A.4 | length 216
  Top Layer w0.4: P9_2.8 82.55,61.968 82.804,61.714 P9.8 ; v1(88.052,59.352) 89.322,58.082 90.94,58.082 91.651,58.793 91.651,59.707 94.623,62.679 99.525,62.679 102.472,65.626 106.104,61.993 106.104,5.555 102.294,1.745 95.377,1.745 R2.2 94.115,2.985 93.48,3.62 93.48,10.414 94.115,11.049 P5.4
  Bottom Layer w0.4: TCA9548A.4 2.319,45.433 2.319,51.579 11.26,60.52 71.267,60.52 71.433,60.354 71.433,58.105 73.16,58.105 73.973,58.918 73.973,60.234 74.252,60.513 81.6,60.513 P9.8 88.01,59.309 v1(88.052,59.352)
SCL0: mux_isc.1 TCA9548A.10 | length 135.8
  Top Layer w0.4: TCA9548A.10 2.98,27.11 2.98,5.402 7.628,0.754 73.525,0.754 v1(74.93,2.159) ; v1(67.674,10.685) 67.674,4.666 v1(68.207,4.132)
  Bottom Layer w0.4: v1(67.674,10.685) 68.514,9.845 83.343,9.845 84.082,10.584 84.082,11.676 86.487,14.081 mux_isc.1 ; v1(68.207,4.132) 70.18,2.159 v1(74.93,2.159)
SCL1: mux_isc.3 TCA9548A.12 | length 87.8
  Bottom Layer w0.4: TCA9548A.12 7.501,19.931 22.096,19.931 24.484,17.543 45.135,17.543 47.157,15.522 70.351,15.522 73.287,18.458 80.809,18.458 82.282,19.931 85.225,19.931 mux_isc.3
SCL2: mux_isc.5 TCA9548A.14 | length 75.6
  Top Layer w0.4: TCA9548A.14 18.22,26.992 18.22,28.821 18.931,29.532 19.928,29.532 20.355,29.105 21.568,29.105 v1(21.59,29.083)
  Bottom Layer w0.4: v1(21.59,29.083) 31.279,29.083 32.107,28.255 45.033,28.255 47.312,25.976 69.198,25.976 71.077,24.097 77.624,24.097 79.275,22.446 85.25,22.446 mux_isc.5
SCL3: mux_isc.7 TCA9548A.16 | length 75.2
  Bottom Layer w0.4: TCA9548A.16 25.43,30.861 25.9,30.391 31.821,30.391 32.591,29.621 53.474,29.621 53.749,29.346 75.649,29.346 76.087,29.784 77.044,29.784 77.892,30.632 77.892,31.721 80.218,31.721 81.848,30.091 84.648,30.091 85.231,29.508 85.231,25.005 mux_isc.7
SCL4: mux_isc.9 TCA9548A.18 | length 132.7
  Bottom Layer w0.4: TCA9548A.18 13.072,35.941 5.774,28.643 5.774,25.646 4.605,24.478 3.716,24.478 2.98,23.741 2.98,20.566 5.723,17.823 8.847,17.823 14.41,12.26 30.793,12.26 30.793,9.822 40.14,9.822 40.851,10.533 40.851,14.354 41.831,15.334 44.331,15.334 45.451,14.214 73.769,14.214 75.472,15.918 80.882,15.918 82.406,17.442 87.714,17.442 87.714,25.062 mux_isc.9
SCL5: mux_isc.11 TCA9548A.20 | length 78.2
  Bottom Layer w0.4: TCA9548A.20 23.343,41.021 26.475,37.889 64.313,37.889 64.944,37.258 71.107,37.258 74.684,40.835 76.97,40.835 78.512,39.293 78.512,36.348 79.643,35.217 79.643,35.179 82.243,32.58 85.174,32.58 85.174,30.979 86.487,29.666 mux_isc.11
SCL6: mux_isc.13 TCA9548A.22 | length 77
  Bottom Layer w0.4: TCA9548A.22 20.531,45.001 60.104,45.026 73.693,45.026 75.243,43.477 76.983,43.477 81.227,39.233 83.345,39.233 87.714,34.864 87.714,32.596 mux_isc.13
SCL7: mux_isc.15 TCA9548A.24 | length 123.9
  Top Layer w0.4: TCA9548A.24 24.367,56.117 24.367,61.841 24.468,61.943 24.468,65.6 50.884,65.6 50.884,62.019 51.011,61.892 51.011,58.105 55.38,58.105 56.091,58.816 56.091,63.162 56.066,63.187 56.066,65.016 56.777,65.727 80.628,65.727 81.339,65.016 81.339,61.866 81.491,61.714 81.491,49.344 79.945,47.798 79.945,42.312 81.39,40.867 v1(81.39,36.543)
  Bottom Layer w0.4: v1(81.39,36.543) 83.853,36.543 mux_isc.15
SDA: P5.3 P9.7 P9_2.7 R1.2 TCA9548A.3 | length 202.1
  Top Layer w0.4: P9_2.7 80.01,61.968 80.264,61.714 P9.7 ; R1.2 96.655,7.684 ; P5.3 97.727,7.684 96.655,7.684 ; v1(104.554,55.567) 104.554,6.952 102.345,4.742 97.341,4.742 97.341,6.998 96.655,7.684
  Bottom Layer w0.4: TCA9548A.3 4.191,45.306 5.418,44.467 5.418,42.334 3.31,42.334 1.659,43.985 1.659,54.272 8.568,61.181 51.646,61.181 52.286,61.821 79.186,61.821 80.01,62.645 P9_2.7 ; P9.7 81.468,58.105 88.4,58.105 89.141,58.846 89.141,60.195 89.467,60.52 95.214,60.52 95.334,60.64 99.306,60.64 100.01,59.936 100.01,56.617 101.06,55.567 v1(104.554,55.567)
SDA0: mux_isc.2 TCA9548A.9 | length 113.4
  Top Layer w0.4: v1(81.915,13.081) 82.816,13.982 83.213,13.982 83.947,14.716 mux_isc.2
  Bottom Layer w0.4: TCA9548A.9 1.659,28.329 1.659,6.977 3.488,5.148 22.106,5.148 26.119,9.161 42.756,9.161 45.848,12.253 77.169,12.253 77.997,13.081 v1(81.915,13.081)
SDA1: mux_isc.4 TCA9548A.11 | length 85.7
  Top Layer w0.4: TCA9548A.11 4.191,24.968 v1(7.755,21.404) ; v1(64.778,16.611) 64.778,16.604 65.565,15.816 79.4,15.816 82.253,18.669 mux_isc.4
  Bottom Layer w0.4: v1(7.755,21.404) 8.517,20.642 23.681,20.642 25.865,18.458 45.529,18.458 47.618,16.369 63.343,16.369 63.543,16.569 64.736,16.569 v1(64.778,16.611)
SDA2: mux_isc.6 TCA9548A.13 | length 72.3
  Bottom Layer w0.4: TCA9548A.13 42.401,23.241 42.582,23.06 51.032,23.06 52.967,21.125 52.967,18.331 59.802,18.331 60.645,19.174 60.645,20.762 64.295,20.762 66.962,23.429 76.97,23.429 78.919,21.48 83.947,21.48 mux_isc.6
SDA3: mux_isc.8 TCA9548A.15 | length 68.7
  Bottom Layer w0.4: TCA9548A.15 19.431,29.634 20.277,29.634 20.815,30.172 25.194,30.172 25.629,29.737 31.55,29.737 32.32,28.967 53.203,28.967 53.478,28.692 70.336,28.692 71.807,27.221 80.475,27.221 mux_isc.8
SDA4: mux_isc.10 TCA9548A.17 | length 131.5
  Top Layer w0.4: v1(18.22,63.39) 18.22,34.612 TCA9548A.17 ; v1(78.735,62.91) 78.751,62.894 78.751,61.675 78.951,61.475 78.951,58.006 79.129,57.828 79.129,40.741 79.62,40.25 79.62,31.124 v1(79.129,30.632)
  Bottom Layer w0.4: v1(18.22,63.39) 19.49,62.12 51.343,62.12 52.385,63.162 65.316,63.162 65.568,62.91 v1(78.735,62.91) ; v1(79.129,30.632) 79.604,30.632 mux_isc.10
SDA5: mux_isc.12 TCA9548A.19 | length 76.8
  Top Layer w0.4: v1(57.082,35.835) 57.917,35.835 60.638,33.114 60.638,31.031 63.127,31.031 65.972,28.186 65.972,23.538 78.656,23.538 mux_isc.12
  Bottom Layer w0.4: TCA9548A.19 20.109,37.803 22.929,37.803 23.615,37.117 55.799,37.117 v1(57.082,35.835)
SDA6: mux_isc.14 TCA9548A.21 | length 79.4
  Bottom Layer w0.4: TCA9548A.21 18.22,42.35 18.22,37.152 19.972,37.152 20.661,36.463 53.84,36.463 55.993,34.311 57.31,34.311 59.604,36.604 71.378,36.604 73.062,38.288 77.392,38.288 77.858,37.822 77.858,36.077 78.989,34.946 78.989,34.909 82.529,31.369 mux_isc.14
SDA7: mux_isc.16 TCA9548A.23 | length 79.2
  Top Layer w0.4: v1(81.034,44.671) 82.558,43.147 v1(82.558,37.965)
  Bottom Layer w0.4: TCA9548A.23 19.431,48.658 70.364,48.658 72.22,46.802 78.903,46.802 v1(81.034,44.671) ; v1(82.558,37.965) 81.186,37.965 80.297,37.076 80.297,35.45 82.406,35.45 mux_isc.16
VCC: C1.2 C2.2 C3.2 C4.2 D1.2 D2.1 E2.1 F1.2 P2.1 X2.1 Y2.1 Z2.1 | length 195.3
  Top Layer w0.8: F1.2 17.927,17.379 P2.1 ; D1.2 19.863,12.895 20.193,13.225 P2.1 ; Y2.1 24.447,48.831 ; X2.1 25.908,32.385 24.447,33.846 24.447,48.831 ; v1(31.529,50.233) 31.529,45.339 C2.2 ; C1.2 31.369,26.289 27.012,21.932 25.693,21.594 22.363,17.67 ; v1(37.448,16.299) 37.871,16.299 38.684,15.486 D2.1 ; E2.1 50.3,51.816 49.589,51.105 49.589,43.629 54.135,43.629 54.135,44.061 55.159,45.085 C4.2@56.066,45.085 ; C4.2 C4.2@56.066,45.085 ; C3.2 56.32,25.654 56.32,23.97 49.843,23.97 49.843,30.412 Z2.1 50.935,32.258 49.589,33.604 49.589,39.819 50.3,40.53 51.511,40.53 C4.2@56.066,45.085 ; P2.1 22.363,17.67 ; 22.363,17.67 22.363,28.033 22.879,28.549 22.879,47.263 24.447,48.831
  Bottom Layer w0.8: P2.1 18.779,16.527 18.779,19.067 21.182,19.067 23.569,16.68 37.067,16.68 v1(37.448,16.299) ; Y2.1 29.269,50.233 v1(31.529,50.233) 49.979,50.233 E2.1
VDD: E2.7 E44.2 E44.4 E44.6 P3.1 P4.1 P5.1 P6.1 P7.1 P11.3 P11_2.3 P18.1 P19.35 P19.36 P19_2.35 P19_2.36 R1.1 R2.1 R3.1 R4.1 R5.1 R6.1 TCA9548A.1 X2.7 X11.2 X11.4 X11.6 Y2.7 Y22.2 Y22.4 Y22.6 Z2.7 Z33.2 Z33.4 Z33.6 | length 445.8
  Top Layer w0.4: P7.1 26.67,11.541 ; R4.1 26.355,35.687 26.355,40.454 29.886,43.985 35.746,43.985 37.989,46.228 Y22.2 ; R3.1 28.108,14.216 26.67,12.778 26.67,11.541 ; P11_2.3 34.622,4.24 34.622,4.842 32.977,6.486 32.977,9.482 P11.3 33.333,12.26 27.389,12.26 26.67,11.541 ; Y22.4 42.799,47.244 Y2.7 ; X2.7 43.18,29.837 43.434,29.583 X11.6 44.501,27.051 45.957,25.595 45.957,21.151 47.404,19.703 47.404,15.74 51.011,12.133 51.011,7.577 P6.1 50.673,5.537 51.374,4.836 51.374,3.421 52.062,2.733 53.094,2.733 53.782,3.421 53.782,6.037 54.44,6.695 54.44,8.628 53.551,9.517 53.551,11.998 51.562,13.987 R5.1 ; R6.1 50.927,34.759 51.57,34.116 55.558,34.116 ; Z33.2 58.047,31.361 58.047,32.783 56.714,34.116 55.558,34.116 ; E44.4 64.516,45.518 65.72,44.314 65.72,42.311 63.051,39.641 63.051,38.575 61.705,37.228 56.65,37.228 55.558,36.136 55.558,34.116 ; E2.7 66.802,49.192 67.056,48.938 E44.6 ; Z2.7 66.929,29.888 67.183,29.634 Z33.6 69.926,27.305 72.55,24.681 78.469,24.681 79.434,25.646 79.434,27.018 82.507,30.091 94.394,30.091 95.029,29.456 95.029,22.623 100.236,22.623 100.99,21.869 ; P19.36 90.424,63.472 90.678,63.726 P4.1 ; P5.1 97.703,3.429 96.198,4.935 R2.1 94.14,4.935 94.14,9.634 R1.1 95.377,9.72 99.119,9.72 99.756,10.357 99.756,12.055 97.595,14.216 97.595,17.518 99.83,17.518 101.092,16.256 P18.1 101.024,17.467 ; P19_2.35 100.719,57.523 100.99,21.869 ; 100.99,21.869 101.024,17.467 ; 100.99,21.869 101.024,21.836 101.024,17.467
  Bottom Layer w0.4: TCA9548A.1 2.98,49.97 2.98,47.363 38.108,47.363 Y22.2 Y22.4 Y22.6 53.069,46.228 53.196,46.355 E44.2 E44.4 E44.6 ; P11_2.3 36.406,2.456 53.831,2.456 53.856,2.481 53.856,4.996 54.44,5.58 54.44,8.45 51.884,8.45 ; X11.2 X11.4 X11.6 ; X2.7 44.366,33.571 45.347,33.571 46.439,34.663 54.313,34.663 55.507,33.469 55.507,31.054 65.081,31.054 65.591,31.564 66.235,31.564 Z2.7 ; P6.1 51.884,8.45 ; Z33.2 Z33.4 Z33.6 ; P3.1 67.884,6.035 57.089,6.035 57.089,7.866 56.429,8.526 51.884,8.45 ; P19.36 P19.35 94.145,59.309 94.272,59.436 P19_2.36 P19_2.35
VIN: D2.2 P11.6 P11_2.6 | length 14.1
  Top Layer w0.4: D2.2 43.151,14.859 43.794,14.216 43.794,12.679 P11.6 43.239,9.974 43.239,5.605 42.799,5.166 P11_2.6
X-DIR: P8.2 P8_2.2 X1.8 | length 17.9
  Top Layer w0.4: X1.8 46.743,18.662 46.743,14.09 P8.2 49.784,9.331 49.36,8.907 49.36,4.615 P8_2.2
X-EN: P19.18 P19_2.18 R3.2 X1.1 | length 175.6
  Top Layer w0.4: v1(17.128,66.743) 17.128,33.901 v1(17.559,33.469) ; X1.1 30.058,17.567 R3.2 ; v1(86.309,66.472) 86.309,56.514 87.384,55.44 93.48,55.44 94.623,54.297 94.623,38.219 P19_2.18
  Bottom Layer w0.4: v1(17.128,66.743) 25.205,66.743 26.068,67.607 85.174,67.607 v1(86.309,66.472) ; v1(17.559,33.469) 17.559,21.518 17.763,21.315 26.31,21.315 X1.1 ; P19.18 91.753,35.12 93.886,35.12 95.342,36.576 P19_2.18
X-MAX: P10.6 P10_2.6 P16.3 | length 45.3
  Top Layer w0.4: P10_2.6 54.737,61.892 54.864,61.765 P10.6
  Bottom Layer w0.4: P10.6 58.03,56.143 70.959,56.143 75.243,51.859 78.646,51.859 81.435,49.07 81.435,46.124 83.32,44.239 85.174,44.239 P16.3
X-MIN: P10.5 P10_2.5 P16.1 | length 71.4
  Top Layer w0.4: P10.5 52.324,61.765 52.197,61.892 P10_2.5 54.433,66.625 82.803,66.625 85.403,64.025 85.403,55.999 88.502,52.9 90.94,52.9 91.651,52.189 91.651,43.426 90.965,42.74 88.841,42.74 P16.1
X-STEP: P8.1 P8_2.1 X1.7 | length 17.5
  Top Layer w0.4: X1.7 46.089,16.776 46.089,12.204 P8.1 47.244,7.612 47.498,7.358 P8_2.1
Y-DIR: P8.8 P8_2.8 Y1.8 | length 48.5
  Top Layer w0.4: Y1.8 48.18,36.402 48.18,22.796 49.561,21.416 54.779,21.416 55.433,20.762 55.433,18.661 56.394,17.7 59.668,17.7 65.024,12.344 P8.8 65.024,7.612 65.278,7.358 P8_2.8
Y-EN: P8.3 P8_2.3 R4.2 Y1.1 | length 66.9
  Top Layer w0.4: R4.2 29.382,37.42 Y1.1 31.647,43.331 36.184,43.331 37.745,44.892 42.282,44.892 43.119,44.055 43.119,42.987 44.128,41.979 44.128,38.041 47.526,34.643 47.526,21.965 49.919,19.572 49.919,14.216 52.324,11.811 P8.3 52.324,9.331 51.9,8.907 51.9,5.902 52.578,5.224 P8_2.3
Y-MAX: P9.2 P9_2.2 P16.7 | length 29.5
  Top Layer w0.4: P9_2.2 67.31,61.968 67.564,61.714 P9.2
  Bottom Layer w0.4: P9.2 69.422,57.451 76.356,57.451 82.743,51.064 82.743,49.87 83.295,49.319 85.174,49.319 P16.7
Y-MIN: P9.1 P9_2.1 P16.5 | length 33.6
  Top Layer w0.4: P9_2.1 64.77,61.968 65.024,61.714 P9.1
  Bottom Layer w0.4: P9.1 67.536,56.797 72.845,56.797 75.243,54.399 77.686,54.399 82.089,49.996 82.089,47.984 83.345,46.728 85.225,46.728 P16.5
Y-STEP: P8.7 P8_2.7 Y1.7 | length 79.8
  Top Layer w0.4: Y1.7 42.799,41.418 41.98,42.237 41.078,42.237 39.055,40.214 39.055,38.097 36.764,35.806 36.764,28.97 36.331,28.537 36.331,21.701 36.889,21.143 36.889,18.991 39.403,16.477 42.68,16.477 44.458,14.699 44.458,10.762 46.185,9.034 46.185,2.786 46.892,2.079 60.507,2.079 62.484,4.056 62.484,7.612 ; P8.7 62.484,7.612 ; P8_2.7 62.738,7.358 62.484,7.612
Z-DIR: P19.8 P19_2.8 Z1.8 | length 30.1
  Top Layer w0.4: v1(81.186,20.388) 83.218,22.42 89.095,22.42 P19.8
  Bottom Layer w0.4: Z1.8 70.807,20.896 77.249,20.896 77.757,20.388 v1(81.186,20.388) ; P19.8 91.753,22.42 93.886,22.42 95.342,23.876 P19_2.8
Z-EN: P21.1 P21_2.1 R5.2 Z1.1 | length 44.8
  Top Layer w0.4: R5.2 52.751,15.24 52.751,16.164 51.689,17.227 Z1.1 54.491,16.756 59.241,16.756 63.737,12.26 64.067,7.002 64.067,3.421 64.778,2.71 69.639,2.71 P21_2.1 70.993,6.164 70.493,6.664 70.493,11.049 P21.1
Z-MAX: P9.6 P9_2.6 P16.11 | length 16.5
  Top Layer w0.4: P9_2.6 77.47,61.968 77.724,61.714 P9.6
  Bottom Layer w0.4: P9.6 79.582,57.451 82.122,57.451 P16.11
Z-MIN: P9.5 P9_2.5 P16.9 | length 20
  Top Layer w0.4: P9_2.5 74.93,61.968 75.184,61.714 P9.5
  Bottom Layer w0.4: P9.5 77.201,57.622 83.066,51.757 85.276,51.757 P16.9
Z-STEP: P19.10 P19_2.10 Z1.7 | length 36.4
  Top Layer w0.4: Z1.7 68.394,21.023 72.042,21.023 74.608,18.458 77.656,18.458 80.748,21.55 80.748,23.173 82.535,24.96 89.095,24.96 P19.10
  Bottom Layer w0.4: P19.10 91.753,24.96 93.886,24.96 95.342,26.416 P19_2.10
pads on no net: SW1.3 SW1.4 TCA9548A.5 TCA9548A.6 TCA9548A.7 TCA9548A.8 TCA9548A.P1 TCA9548A.P2

## Polygon pours and split planes (outlines as drawn)
gnd on Bottom Layer "GND_L02_P001" (solid, pour order 1): 0,68.961 0,0 106.934,0 106.934,68.961
gnd on Top Layer "GND_L01_P000" (solid, pour order 0): 0,68.961 0,0 106.934,0 106.934,68.961

## Silkscreen, mask and mechanical layers (free items; w line width, h text height)
Top Overlay:
  drawing of 126 lines, arcs and shapes, not listed
  text "36" at 90.297,61.087 h0.9 r90
  text "stepper motor driver arduino shield" at 3.048,55.799 h0.9
  text "Z+" at 81.915,52.705 h0.9 r90
  text "Z-" at 81.915,50.038 h0.9 r90
  text "Y+" at 81.788,47.244 h0.9 r90
  text "Y-" at 81.788,44.704 h0.9 r90
  text "X+" at 81.788,42.418 h0.9 r90
  text "X-" at 81.788,39.37 h0.9 r90
  text "Mulugeta T. Tadesse @2025" at 105.331,1.905 h1 r90
Mechanical 1:
  the board outline again, w0.254

## Text inside footprints (layer, text, board x,y; h text height)
E44: Top Overlay "6" at 68.834,45.847 h0.9; Top Overlay "5" at 68.834,43.307 h0.9; Top Overlay "2" at 59.436,45.847 h0.9; Top Overlay "1" at 59.944,43.307 h0.9
mux_isc: Top Overlay "2" at 84.455,13.589 h0.9 r90; Top Overlay "1" at 86.995,13.589 h0.9 r90; Top Overlay "15" at 86.995,35.814 h0.9 r90; Top Overlay "16" at 84.455,35.687 h0.9 r90
P16: Top Overlay "12" at 84.455,55.118 h0.9 r90; Top Overlay "1" at 86.995,56.134 h0.9 r90; Top Overlay "1" at 86.995,55.118 h0.9 r90; Top Overlay "1" at 86.995,37.846 h0.9 r90; Top Overlay "2" at 84.455,37.846 h0.9 r90
P19: Top Overlay "2" at 90.932,13.081 h0.9 r90; Top Overlay "1" at 93.472,13.589 h0.9 r90; Top Overlay "35" at 93.472,61.087 h0.9 r90
P19_2: Top Overlay "36" at 96.774,61.214 h0.9 r90; Top Overlay "35" at 99.06,61.341 h0.9 r90; Top Overlay "1" at 99.314,13.716 h0.9 r90; Top Overlay "2" at 96.774,13.208 h0.9 r90
X11: Top Overlay "6" at 45.212,26.543 h0.9; Top Overlay "5" at 45.212,24.003 h0.9; Top Overlay "2" at 35.814,26.543 h0.9; Top Overlay "1" at 36.322,24.003 h0.9
Y22: Top Overlay "6" at 46.101,45.72 h0.9; Top Overlay "5" at 46.101,43.18 h0.9; Top Overlay "2" at 36.703,45.72 h0.9; Top Overlay "1" at 37.211,43.18 h0.9
Z33: Top Overlay "6" at 68.961,26.797 h0.9; Top Overlay "5" at 68.961,24.257 h0.9; Top Overlay "2" at 59.563,26.797 h0.9; Top Overlay "1" at 60.071,24.257 h0.9